# EAGLE board Bio_v4_LCD1_0_panelized (EAGLE 7.5.0)
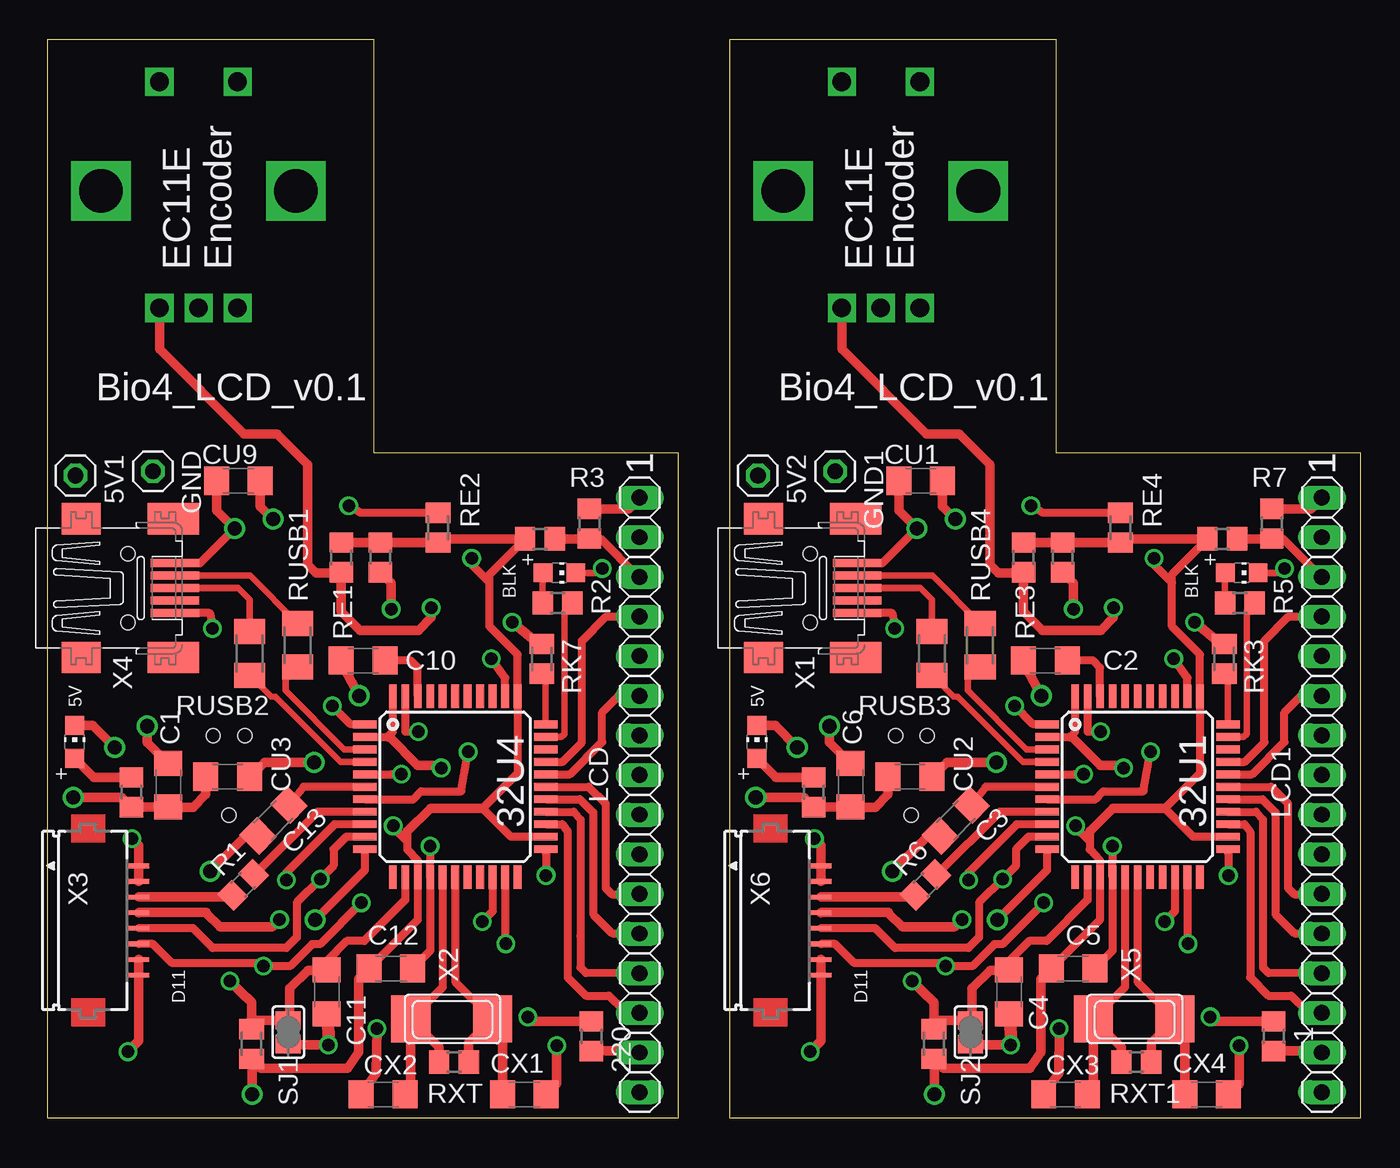
[diagram p0: board, top side]
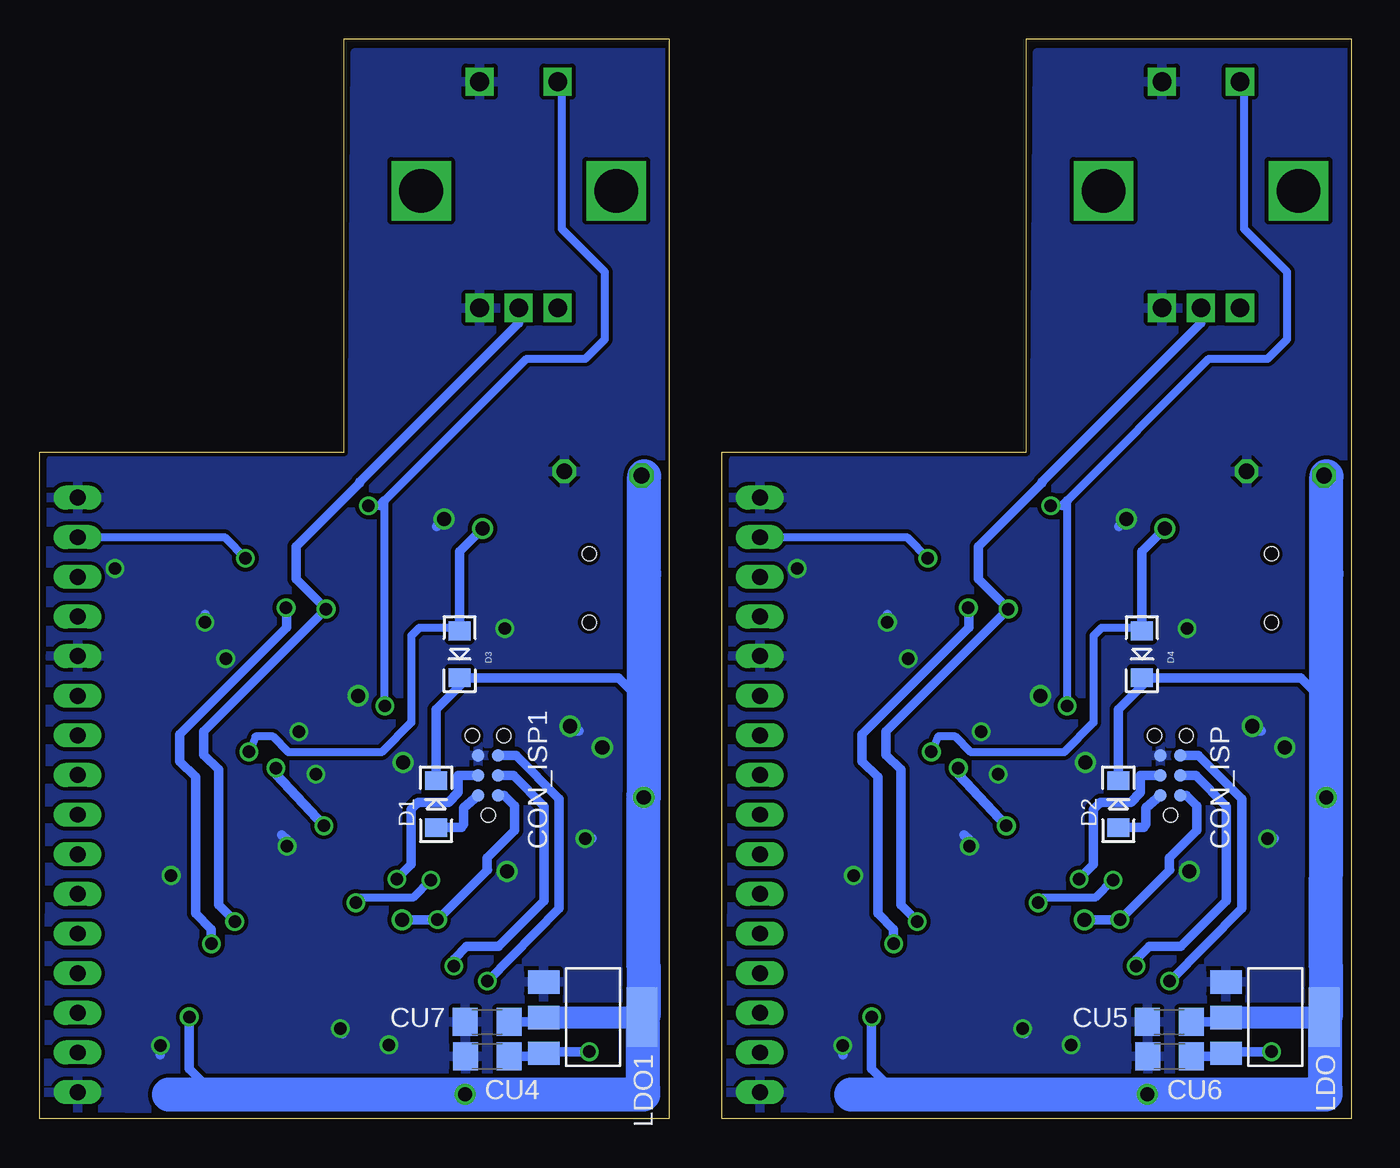
[diagram p1: board, bottom side, seen from below]

Size 84.13 x 69.15 mm. Coordinates in mm from the lower left corner, seen from the top.
Outline: 40.41,42.66 40.41,0 0,0 0,69.15 20.89,69.15 20.89,42.66 40.41,42.66
Outline: 84.13,42.66 84.13,0 43.72,0 43.72,69.15 64.61,69.15 64.61,42.66 84.13,42.66
Copper layers (1*2*15*16): Top 0.035mm / dielectric 0.2mm / layer 2 0.0175mm / dielectric 1.1mm / layer 15 0.0175mm / dielectric 0.2mm / Bottom 0.035mm
Design rules "SeeedStudio_DRU_no_angle_20130527": minimum track width 6mil, minimum drill 12mil, track to track 6mil, track to pad 6mil, pad to pad 6mil, via to via 6mil, smd to smd 0mil, copper to edge 10mil, drill to drill 10mil, minimum pad ring 6mil, minimum via ring 6mil, stop-mask expansion 2mil, vias tented up to drill 25mil, thermal gap 10mil
Net classes: 0 default: width 0.203 mm, clearance 0.25 mm; 1 power: width 0.203 mm, drill 0.305 mm, clearance 0.25 mm; 2 VIN: width 0.457 mm, clearance 0.25 mm; 3 fine: width 0.254 mm, clearance 0.25 mm; 4 aref: width 0.356 mm, clearance 0.25 mm
vRestrict: area 3.1,8.7 to 6.9,16.8; area 46.8,8.7 to 50.7,16.8

## Footprints (pad centres in the part's own frame; a part is rotated, then mirrored left to right if it is on the bottom)
R0805 = smd 1.3 x 1.5: 1 -0.95,0; 2 0.95,0
1X01 = drill 1.016 octagon: 1 0,0
TQFP44 = smd 1.5 x 0.5: 1 -5.8,4; 2 -5.8,3.2; 3 -5.8,2.4; 4 -5.8,1.6; 5 -5.8,0.8; 6 -5.8,0; 7 -5.8,-0.8; 8 -5.8,-1.6; 9 -5.8,-2.4; 10 -5.8,-3.2; 11 -5.8,-4; 23 5.8,-4; 24 5.8,-3.2; 25 5.8,-2.4; 26 5.8,-1.6; 27 5.8,-0.8; 28 5.8,0; 29 5.8,0.8; 30 5.8,1.6; 31 5.8,2.4; 32 5.8,3.2; 33 5.8,4 | smd 0.5 x 1.5: 12 -4,-5.8; 13 -3.2,-5.8; 14 -2.4,-5.8; 15 -1.6,-5.8; 16 -0.8,-5.8; 17 0,-5.8; 18 0.8,-5.8; 19 1.6,-5.8; 20 2.4,-5.8; 21 3.2,-5.8; 22 4,-5.8; 34 4,5.8; 35 3.2,5.8; 36 2.4,5.8; 37 1.6,5.8; 38 0.8,5.8; 39 0,5.8; 40 -0.8,5.8; 41 -1.6,5.8; 42 -2.4,5.8; 43 -3.2,5.8; 44 -4,5.8
CHIP-LED0805 = smd 1.2 x 1.2: A 0,-1.05; C 0,1.05
C1206 = smd 1.6 x 1.8: 1 -1.4,0; 2 1.4,0
TC2030-MCP-NL = smd 0.787 x 0.787: 5V 1.27,0.635; GND 3.81,0.635; MISO 1.27,-0.635; MOSI 2.54,0.635; RESET 3.81,-0.635; SCK 2.54,-0.635 | hole 0.889: 0,0; 5.08,-1.016; 5.08,1.016
LED-1206 = smd 1.2 x 1.4: A -1.5,0; C 1.5,0
1X16 = drill 1.016 long: 1 -19.05,0; 2 -16.51,0; 3 -13.97,0; 4 -11.43,0; 5 -8.89,0; 6 -6.35,0; 7 -3.81,0; 8 -1.27,0; 9 1.27,0; 10 3.81,0; 11 6.35,0; 12 8.89,0; 13 11.43,0; 14 13.97,0; 15 16.51,0; 16 19.05,0
SOT223 = smd 1.499 x 2.007: 1 -2.261,-3.15; 2 0.025,-3.15; 3 2.311,-3.15 | smd 3.81 x 2.007: 4 0,3.15
M0805 = smd 1.3 x 1.6: 1 -0.95,0; 2 0.95,0
M1206 = smd 1.6 x 2: 1 -1.4,0; 2 1.4,0
SJ = smd 1.168 x 1.6: 1 -0.762,0; 2 0.762,0
EC11E = drill 1.2 square: A -2.5,0; B 0,0; C 2.5,0; D -2.5,14.5; E 2.5,14.5 | drill 2.8 square: P$1 6.25,7.5; P$2 -6.25,7.5
32005-201 = smd 3.1 x 0.5: 1 3,1.6; 2 3,0.8; 3 3,0; 4 3,-0.8; 5 3,-1.6 | smd 2.5 x 2: M1 -3,-4.45; M2 -3,4.45 | smd 3.3 x 2: M3 2.9,4.45; M4 2.9,-4.45 | hole 0.9: 0,2.2; 0,-2.2
NX6035 = smd 2.5 x 3: P$1 2.665,0; P$2 -2.565,0
FH12-08S-1SH = smd 0.3 x 1.3: 1 -3.5,3.25; 2 -2.5,3.25; 3 -1.5,3.25; 4 -0.5,3.25; 5 0.5,3.25; 6 1.5,3.25; 7 2.5,3.25; 8 3.5,3.25

## Placement (x,y rotation side)
1  220  [R0805]  78.56,5.25 270 top
5V1  [1X01]  1.79,41.19 270 top
5V2  [1X01]  45.51,41.19 270 top
32U1  32U4  [TQFP44]  69.84,21.24 0 top
32U4  32U4  [TQFP44]  26.12,21.24 0 top
220  220  [R0805]  34.85,5.25 270 top
BKLD  RED  [CHIP-LED0805]  32.8,34.95 270 top
BKLD1  RED  [CHIP-LED0805]  76.51,34.95 270 top
C1  100nF  [C1206]  7.74,21.34 90 top
C2  100nF  [C1206]  63.93,29.32 180 top
C3  100nF  [C1206]  58.19,19.08 45 top
C4  100nF  [C1206]  61.61,8.1 270 top
C5  100nF  [C1206]  65.72,9.6 180 top
C6  100nF  [C1206]  51.46,21.34 90 top
C10  100nF  [C1206]  20.22,29.32 180 top
C11  100nF  [C1206]  17.89,8.1 270 top
C12  100nF  [C1206]  22,9.6 180 top
C13  100nF  [C1206]  14.48,19.08 45 top
CON_ISP  SPI  [TC2030-MCP-NL]  11.63,19.43 90 bottom
CON_ISP1  SPI  [TC2030-MCP-NL]  55.35,19.43 90 bottom
CU1  10uF  [C1206]  55.95,40.84 180 top
CU2  10uF  [C1206]  55.26,21.88 0 top
CU3  10uF  [C1206]  11.54,21.88 0 top
CU4  10uF  [C1206]  55.41,3.97 180 bottom
CU5  10uF  [C1206]  11.7,6.17 180 bottom
CU6  10uF  [C1206]  11.69,3.97 180 bottom
CU7  10uF  [C1206]  55.42,6.17 180 bottom
CU9  10uF  [C1206]  12.23,40.84 180 top
CX1  22pF  [C1206]  30.55,1.53 180 top
CX2  22pF  [C1206]  21.5,1.52 0 top
CX3  22pF  [C1206]  65.22,1.52 0 top
CX4  22pF  [C1206]  74.27,1.53 180 top
D1  1N581D1206  [LED-1206]  58.69,20.12 90 bottom
D2  1N581D1206  [LED-1206]  14.97,20.12 90 bottom
D3  1N581D1206  [LED-1206]  57.17,29.73 270 bottom
D4  1N581D1206  [LED-1206]  13.46,29.73 270 bottom
GND  [1X01]  6.75,41.45 270 top
GND1  [1X01]  50.47,41.45 270 top
LCD  [1X16]  37.94,20.72 270 top
LCD1  [1X16]  81.66,20.72 270 top
LDO  NCP1117LPST50T3G  [SOT223]  4.92,6.47 270 bottom
LDO1  NCP1117LPST50T3G  [SOT223]  48.64,6.47 270 bottom
LDPW1  RED  [CHIP-LED0805]  45.45,24.11 0 top
LDPW5  RED  [CHIP-LED0805]  1.74,24.11 0 top
R1  1k  [R0805]  12.53,14.95 45 top
R2  1k  [R0805]  32.67,33.01 180 top
R3  1k  [R0805]  34.72,38.09 90 top
R4  1k  [R0805]  49.09,20.89 90 top
R5  1k  [R0805]  76.39,33.01 180 top
R6  1k  [R0805]  56.25,14.95 45 top
R7  1k  [R0805]  78.44,38.09 90 top
R13  1k  [R0805]  5.37,20.89 90 top
RE1  5k  [R0805]  18.82,35.93 270 top
RE2  5k  [R0805]  21.32,35.94 270 top
RE3  5k  [R0805]  62.54,35.93 270 top
RE4  5k  [R0805]  65.04,35.94 270 top
RK1  10k  [R0805]  31.55,37.12 0 top
RK2  10k  [M0805]  25.01,37.84 270 top
RK3  10k  [M0805]  75.39,29.43 270 top
RK4  10k  [M0805]  56.79,4.76 270 top
RK5  10k  [R0805]  75.27,37.12 0 top
RK6  10k  [M0805]  13.07,4.76 270 top
RK7  10k  [M0805]  31.67,29.43 270 top
RK8  10k  [M0805]  68.73,37.84 270 top
RUSB1  22  [M1206]  16.03,30.31 90 top
RUSB2  22  [M1206]  12.96,29.77 90 top
RUSB3  22  [M1206]  56.67,29.77 90 top
RUSB4  22  [M1206]  59.75,30.31 90 top
RXT  1M  [R0805]  26.04,3.6 0 top
RXT1  1M  [R0805]  69.76,3.6 0 top
SJ1  [SJ]  15.42,5.51 90 top
SJ2  [SJ]  59.14,5.51 90 top
U$1  EC11E  [EC11E]  9.67,51.92 0 top
U$2  EC11E  [EC11E]  53.39,51.92 0 top
X1  MINI-USB  [32005-201]  48.88,33.97 0 top
X2  16MHz  [NX6035]  25.94,6.36 180 top
X3  FH12-08S-1SH  [FH12-08S-1SH]  2.6,12.67 270 top
X4  MINI-USB  [32005-201]  5.16,33.97 0 top
X5  16MHz  [NX6035]  69.66,6.36 180 top
X6  FH12-08S-1SH  [FH12-08S-1SH]  46.32,12.67 270 top

## Library data of the parts
1 220 C1-C6 C10-C13 CU1-CU7 CU9 CX1-CX4 R1-R3 R5-R7 RE1-RE4 RK1 RK5 RXT RXT1 = rcl
5V1 5V2 GND GND1 = Headerlibrary
32U1 32U4 BKLD BKLD1 LDPW1 LDPW5 = adafruit
CON_ISP CON_ISP1 D1-D4 LCD LCD1 LDO LDO1 U$1 U$2 X2 X5 = lpatiny
R4 R13 RK2-RK4 RK6-RK8 RUSB1-RUSB4 = resistor
SJ1 SJ2 = jumper
X1 X4 = con-cypressindustries; OC_FARNELL: unknown; OC_NEWARK: unknown
X3 X6 = con-hirose; OC_FARNELL: unknown; OC_NEWARK: unknown

## Nets
+5V/1 [fine]: 5V1.1 32U4.2 32U4.14 32U4.24 32U4.34 32U4.44 220.1 C1.1 C12.2 CU3.1 CU5.1 D2.C D4.C LCD.2 LDO.2 LDO.4 R13.1 RE1.1 RE2.1 RK1.1 RK2.2 RK6.2
+5V/2 [fine]: 1.1 5V2.1 32U1.2 32U1.14 32U1.24 32U1.34 32U1.44 C5.2 C6.1 CU2.1 CU7.1 D1.C D3.C LCD1.2 LDO1.2 LDO1.4 R4.1 RE3.1 RE4.1 RK4.2 RK5.1 RK8.2
+12V [power]: CU6.1 LDO.3 X3.7 X3.8
+12V1 [power]: CU4.1 LDO1.3 X6.7 X6.8
A0: 32U4.36
A1: 32U4.37
A2: 32U4.38
A3: 32U4.39
A4: 32U4.40
A5: 32U4.41
A6: 32U4.25 LCD.14
A7: 32U1.38
A8: 32U1.39
A9: 32U1.40
A10: 32U1.41
A11: 32U1.37
A12: 32U1.36
A13: 32U1.25 LCD1.14
AREF: 32U4.42 C10.1
AREF1: 32U1.42 C2.1
CS_32U1: R6.1 X6.3
CS_32U4: R1.1 X3.3
D5*: 32U4.31
D5*1: 32U1.31
D6*: 32U4.27 LCD.12
D6*1: 32U1.27 LCD1.12
D7*: 32U4.1 RK2.1 U$1.D
D7*1: 32U1.1 RK8.1 U$2.D
D8*: 32U4.28 LCD.11
D8*1: 32U1.28 LCD1.11
D9*: 32U4.29 LCD.6
D9*1: 32U1.29 LCD1.6
D10*: 32U4.30 LCD.4
D10*1: 32U1.30 LCD1.4
D11*: 32U4.12
D11*1: 32U1.12
D12*: 32U4.26 LCD.13
D12*1: 32U1.26 LCD1.13
D13*: 32U4.32 R2.1
D13*1: 32U1.32 R5.1
GND [power]: 32U4.5 32U4.15 32U4.23 32U4.35 32U4.43 BKLD.C C1.2 C10.2 C11.2 C12.1 C13.1 CON_ISP.GND CU3.2 CU5.2 CU6.2 CU9.1 CX1.1 CX2.1 GND.1 LCD.1 LCD.5 LCD.16 LDO.1 LDPW5.C R3.2 RK7.1 SJ1.1 U$1.C U$1.E X3.1 X3.2 X4.5
GND1 [power]: 32U1.5 32U1.15 32U1.23 32U1.35 32U1.43 BKLD1.C C2.2 C3.1 C4.2 C5.1 C6.2 CON_ISP1.GND CU1.1 CU2.2 CU4.2 CU7.2 CX3.1 CX4.1 GND1.1 LCD1.1 LCD1.5 LCD1.16 LDO1.1 LDPW1.C R7.2 RK3.1 SJ2.1 U$2.C U$2.E X1.5 X6.1 X6.2
HWB: 32U4.33 RK7.2
HWB1: 32U1.33 RK3.2
ISP+5V: CON_ISP.5V D2.A
ISP+5V1: CON_ISP1.5V D1.A
MISO: 32U4.11 CON_ISP.MISO X3.4
MISO1: 32U1.11 CON_ISP1.MISO X6.4
MOSI: 32U4.10 CON_ISP.MOSI X3.5
MOSI1: 32U1.10 CON_ISP1.MOSI X6.5
N$1: 32U4.6 C13.2
N$2: LCD.3 R3.1 RK1.2
N$3: BKLD.A R2.2
N$4: LDPW1.A R4.2
N$5: BKLD1.A R5.2
N$6: 32U1.17 CX4.2 RXT1.2 X5.P$2
N$7: 32U1.6 C3.2
N$8: LCD1.3 R7.1 RK5.2
N$9: 1.2 LCD1.15
N$11: 220.2 LCD.15
N$12: LDPW5.A R13.2
N$42: 32U4.17 CX1.2 RXT.2 X2.P$2
RESET: 32U4.13 C11.1 CON_ISP.RESET RK6.1 SJ1.2
RESET1: 32U1.13 C4.1 CON_ISP1.RESET RK4.1 SJ2.2
RX: 32U4.20 RE2.2 U$1.B
RX1: 32U1.20 RE4.2 U$2.B
RXLED: 32U4.8 R1.2
RXLED1: 32U1.8 R6.2
SCK: 32U4.9 CON_ISP.SCK X3.6
SCK1: 32U1.9 CON_ISP1.SCK X6.6
SCL: 32U4.18
SCL1: 32U1.18
SDA: 32U4.19
SDA1: 32U1.19
TX: 32U4.21 RE1.2 U$1.A
TX1: 32U1.21 RE3.2 U$2.A
TXLED: 32U4.22
TXLED1: 32U1.22
USB_N: 32U4.3 RUSB1.1
USB_N1: 32U1.3 RUSB4.1
USB_P: 32U4.4 RUSB2.1
USB_P1: 32U1.4 RUSB3.1
USBC_N: RUSB1.2 X4.2
USBC_N1: RUSB4.2 X1.2
USBC_P: RUSB2.2 X4.3
USBC_P1: RUSB3.2 X1.3
VUSB: 32U4.7 CU9.2 D4.A X4.1
VUSB1: 32U1.7 CU1.2 D3.A X1.1
XTAL1: 32U4.16 CX2.2 RXT.1 X2.P$1
XTAL2: 32U1.16 CX3.2 RXT1.1 X5.P$1

## Tracks (layer width: path | path; a pad name or v marks a point on that pad's centre or on a via)
+5V/1  (via drill 0.8, 0.8 pad 0.81, 0.9, 0.9 pad 0.61)
  Top 0.5: 32U4.24 29.68,18.04 27.87,19.85 30.12,22.1 32U4.34 30.12,29.71 28.32,31.51 28.32,34.33 | 23.05,18.36 23.05,17.73 | 23.05,17.73 23.05,17.22 23.72,16.51 23.72,15.45 32U4.14 23.72,12.72 C12.2 | 32U4.44 22.12,24.75 21.81,24.44 32U4.2 | 22.05,18.74 23.05,17.73 | 28.32,34.33 28.32,34.84 RK1.1 | v27.18,35.88 27.18,35.47 28.32,34.33
  Top 0.61: 27.87,19.85 24.54,19.85 23.05,18.36 | C12.2 19.93,8.93 19.93,4.23 19.23,3.21 13.67,3.21 13.1,3.77 | 21.81,24.44 21.91,24.44 23.73,22.62 25.04,22.62 v25.22,22.44 | v22.15,18.74 22.05,18.74 | RK6.2 13.1,3.77 | 13.1,3.77 v13.1,1.52 | v1.66,20.56 4.75,20.56 R13.1 C1.1 7.75,19.93 9.32,19.93 10.14,20.75 CU3.1 | 220.1 31.07,6.2 v30.78,6.49 | RE1.1 RE2.1 RK2.2 25.24,37.12 RK1.1 30.37,36.89
  Bottom 0.254: 5V1.1 1.53,41.42 1.64,41.13
  Bottom 0.5: LCD.2 28.52,37.23 v27.18,35.88
  Bottom 0.61: v25.22,22.44 25.22,22.04 v22.15,18.74 | 2.4,1.52 2.06,1.52 1.7,1.88 | v1.66,20.56 v1.66,20.57 1.66,21.06 | v30.78,6.49 30.78,3.15 29.15,1.52 | D4.C 12.95,28.23 | 12.95,28.23 3.26,28.23 1.65,26.61 | D2.C 14.97,26.21 12.95,28.23 | 1.68,9.86 1.68,10.36 1.68,10.37 | CU5.1 8.35,6.17 LDO.2
  Bottom 1.422: LDO.2 8.07,6.47 LDO.4
  Bottom 2.184: 32.1,1.52 31.61,1.52 29.15,1.52 v13.1,1.52 2.4,1.52 1.7,1.52 1.7,1.88 1.7,6.47 LDO.4 1.68,6.47 1.68,9.86 1.68,10.37 v1.66,20.56 1.66,21.06 1.65,25.49 1.65,26.61 1.65,29.21 1.64,34.88 1.64,41.13
+5V/2  (via drill 0.8, 0.8 pad 0.81, 0.9, 0.9 pad 0.61)
  Top 0.5: 32U1.24 73.4,18.04 71.59,19.85 73.84,22.1 32U1.34 73.84,29.71 72.04,31.51 72.04,34.33 | 66.77,18.36 66.77,17.73 | 66.77,17.73 66.77,17.22 67.44,16.51 67.44,15.45 32U1.14 67.44,12.72 C5.2 | 32U1.44 65.84,24.75 65.52,24.44 32U1.2 | 65.77,18.74 66.77,17.73 | 72.04,34.33 72.04,34.84 RK5.1 | v70.89,35.88 70.89,35.47 72.04,34.33
  Top 0.61: 71.59,19.85 68.26,19.85 66.77,18.36 | C5.2 63.65,8.93 63.65,4.23 62.95,3.21 57.39,3.21 56.82,3.77 | 65.52,24.44 65.63,24.44 67.44,22.62 68.76,22.62 v68.94,22.44 | v65.87,18.74 65.77,18.74 | RK4.2 56.82,3.77 | 56.82,3.77 v56.82,1.52 | v45.38,20.56 48.47,20.56 R4.1 C6.1 51.47,19.93 53.04,19.93 53.86,20.75 CU2.1 | 1.1 74.79,6.2 v74.5,6.49 | RE3.1 RE4.1 RK8.2 68.96,37.12 RK5.1 74.09,36.89
  Bottom 0.254: 5V2.1 45.25,41.42 45.36,41.13
  Bottom 0.5: LCD1.2 72.24,37.23 v70.89,35.88
  Bottom 0.61: v68.94,22.44 68.94,22.04 v65.87,18.74 | 46.12,1.52 45.78,1.52 45.42,1.88 | v45.38,20.56 v45.38,20.57 45.38,21.06 | v74.5,6.49 74.5,3.15 72.87,1.52 | D3.C 56.67,28.23 | 56.67,28.23 46.98,28.23 45.37,26.61 | D1.C 58.69,26.21 56.67,28.23 | 45.4,9.86 45.4,10.36 45.4,10.37 | CU7.1 52.06,6.17 LDO1.2
  Bottom 1.422: LDO1.2 51.79,6.47 LDO1.4
  Bottom 2.184: 75.82,1.52 75.33,1.52 72.87,1.52 v56.82,1.52 46.12,1.52 45.42,1.52 45.42,1.88 45.42,6.47 LDO1.4 45.4,6.47 45.4,9.86 45.4,10.37 v45.38,20.56 45.38,21.06 45.37,25.49 45.37,26.61 45.37,29.21 45.36,34.88 45.36,41.13
+12V  (via drill 0.8)
  Top 0.61: X3.7 X3.8 5.85,4.96 v5.15,4.26
  Bottom 0.61: v5.15,4.26 7.97,4.26 LDO.3 8.26,3.97 CU6.1
+12V1  (via drill 0.8)
  Top 0.61: X6.7 X6.8 49.57,4.96 v48.87,4.26
  Bottom 0.61: v48.87,4.26 51.69,4.26 LDO1.3 51.98,3.97 CU4.1
A6
  Top 0.5: 32U4.25 32.98,18.84 33.33,18.37 33.33,9.02 34.5,7.85 35.97,7.85 36.89,6.93 38.09,6.93 LCD.14
A13
  Top 0.5: 32U1.25 76.7,18.84 77.05,18.37 77.05,9.02 78.22,7.85 79.69,7.85 80.61,6.93 81.8,6.93 LCD1.14
AREF
  Top 0.5: 32U4.42 23.72,28.86 23.73,28.87 23.28,29.32 C10.1
AREF1
  Top 0.5: 32U1.42 67.44,28.86 67.45,28.87 67,29.32 C2.1
CS_32U1
  Top 0.61: X6.3 55.47,14.17 R6.1
CS_32U4
  Top 0.61: X3.3 11.75,14.17 R1.1
D6*
  Top 0.5: 32U4.27 34.12,20.44 34.96,19.6 34.96,13.07 36.17,11.86 38.23,11.86 LCD.12
D6*1
  Top 0.5: 32U1.27 77.84,20.44 78.67,19.6 78.67,13.07 79.89,11.86 81.95,11.86 LCD1.12
D7*  (via drill 0.8)
  Top 0.5: 32U4.1 19.43,25.24 v18.25,26.42 | RK2.1 20.07,38.79 v19.3,39.25
  Bottom 0.5: v18.25,26.42 18.25,39.58 9.16,48.66 5.4,48.66 4.15,49.92 4.15,54.22 6.91,56.98 6.91,66.16 | v19.3,39.25 18.56,39.27
  Bottom 0.61: 6.91,66.16 U$1.D | 18.56,39.27 18.25,39.58
D7*1  (via drill 0.8)
  Top 0.5: 32U1.1 63.15,25.24 v61.97,26.42 | RK8.1 63.79,38.79 v63.01,39.25
  Bottom 0.5: v61.97,26.42 61.97,39.58 52.88,48.66 49.12,48.66 47.87,49.92 47.87,54.22 50.63,56.98 50.63,66.16 | v63.01,39.25 62.27,39.27
  Bottom 0.61: 50.63,66.16 U$2.D | 62.27,39.27 61.97,39.58
D8*
  Top 0.5: 32U4.28 34.68,21.24 35.76,20.16 35.76,14.75 36.16,14.35 37.92,14.35
  Top 0.61: 37.92,14.35 LCD.11
D8*1
  Top 0.5: 32U1.28 78.4,21.24 79.48,20.16 79.48,14.75 79.87,14.35 81.64,14.35
  Top 0.61: 81.64,14.35 LCD1.11
D9*
  Top 0.5: 32U4.29 33.47,22.04 35.53,24.1 35.53,26 36.62,27.09 37.92,27.09
  Top 0.61: 37.92,27.09 LCD.6
D9*1
  Top 0.5: 32U1.29 77.19,22.04 79.25,24.1 79.25,26 80.34,27.09 81.64,27.09
  Top 0.61: 81.64,27.09 LCD1.6
D10*
  Top 0.5: 32U4.30 33,22.84 34.25,24.08 34.25,30.59 35.8,32.14 LCD.4
  Top 0.61: LCD.4
D10*1
  Top 0.5: 32U1.30 76.72,22.84 77.97,24.08 77.97,30.59 79.52,32.14 LCD1.4
  Top 0.61: LCD1.4
D12*
  Top 0.5: 32U4.26 33.72,19.64 34.15,19.12 34.15,11.68 34.15,9.66 34.5,9.31 LCD.13
D12*1
  Top 0.5: 32U1.26 77.44,19.64 77.87,19.12 77.87,11.68 77.87,9.66 78.22,9.31 LCD1.13
D13*
  Top 0.406: 32U4.32 32.91,24.44 33.13,24.62 33.13,32.48 R2.1
D13*1
  Top 0.406: 32U1.32 76.63,24.44 76.84,24.62 76.84,32.48 R5.1
GND  (via drill 0.8, 0.8 pad 0.81, 0.9, 0.9 pad 0.81)
  Top 0.406: BKLD.C 35.26,34.95 v35.54,35.22
  Top 0.5: v24.51,17.43 24.53,17.35 32U4.15 24.52,10.72 C12.1 | 32U4.5 22.05,22.04 v22.67,22.05 | 32U4.23 31.93,16.97 v31.94,15.56 | 32U4.43 22.92,24.78 v23.76,24.77 | v10.57,31.38 10.41,32.35 10.39,32.37 X4.5 | 32U4.35 29.32,28.22 v28.44,29.44
  Top 0.61: CX2.1 21.07,2.89 v21.1,5.74 | v32.63,4.66 32.63,2.21 CX1.1 | C10.2 18.76,29.33 v19.95,27.07 | SJ1.1 15.47,4.7 v18,4.7 | LDPW5.C 2.91,25.16 v4.32,23.75 | C1.2 6.38,24.09 v6.38,25.12 | CU3.2 13.9,22.8 v17.08,22.8 | CU9.1 13.63,39.21 v14.45,38.39 | RK7.1 31.28,30.56 v29.77,31.79 | LCD.1 37.21,39.04 R3.2 | C13.1 12.68,18.09 v10.41,15.81 | X3.2 X3.1 5.85,17.48 v5.42,17.92
  Top 0.813: C11.2 17.99,6.54 v18,4.7
  Bottom 0.406: v35.54,35.22 35.46,35.22 35.34,35.34
  Bottom 0.5: v24.51,17.43 24.52,17.82
  Bottom 0.61: 24.52,17.82 24.86,18.16 | v32.63,4.66 32.63,4.07 | v21.1,5.74 21.08,5.54 20.95,5.4 | v4.32,23.75 4.32,23.89 4.3,23.91 | v6.38,25.12 6.07,24.81 5.82,24.81 | v17.08,22.8 16.87,23.07 17.12,22.97 | v14.45,38.39 | v14.45,38.39 14.92,37.92 | v29.77,31.79 29.77,32.27 | v5.42,17.92 4.97,17.92
  pour Bottom: 0.54,0.44 0.52,0.4 39.78,0.67 39.62,42.17 20.34,42.17 20.16,68.28 0.26,68.28 0.16,1.7 0.28,0.68
GND1  (via drill 0.8, 0.8 pad 0.81, 0.9, 0.9 pad 0.81)
  Top 0.406: BKLD1.C 78.98,34.95 v79.26,35.22
  Top 0.5: v68.23,17.43 68.25,17.35 32U1.15 68.24,10.72 C5.1 | 32U1.5 65.77,22.04 v66.38,22.05 | 32U1.23 75.65,16.97 v75.66,15.56 | 32U1.43 66.64,24.78 v67.48,24.77 | v54.29,31.38 54.13,32.35 54.11,32.37 X1.5 | 32U1.35 73.04,28.22 v72.16,29.44
  Top 0.61: CX3.1 64.79,2.89 v64.82,5.74 | v76.35,4.66 76.35,2.21 CX4.1 | C2.2 62.47,29.33 v63.67,27.07 | SJ2.1 59.19,4.7 v61.72,4.7 | LDPW1.C 46.63,25.16 v48.03,23.75 | C6.2 50.1,24.09 v50.1,25.12 | CU2.2 57.62,22.8 v60.8,22.8 | CU1.1 57.35,39.21 v58.17,38.39 | RK3.1 75,30.56 v73.49,31.79 | LCD1.1 80.93,39.04 R7.2 | C3.1 56.4,18.09 v54.13,15.81 | X6.2 X6.1 49.57,17.48 v49.14,17.92
  Top 0.813: C4.2 61.71,6.54 v61.72,4.7
  Bottom 0.406: v79.26,35.22 79.18,35.22 79.06,35.34
  Bottom 0.5: v68.23,17.43 68.24,17.82
  Bottom 0.61: 68.24,17.82 68.58,18.16 | v76.35,4.66 76.35,4.07 | v64.82,5.74 64.8,5.54 64.67,5.4 | v48.03,23.75 48.03,23.89 48.01,23.91 | v50.1,25.12 49.79,24.81 49.54,24.81 | v60.8,22.8 60.59,23.07 60.83,22.97 | v58.17,38.39 | v58.17,38.39 58.64,37.92 | v73.49,31.79 73.49,32.27 | v49.14,17.92 48.69,17.92
  pour Bottom: 44.26,0.44 44.24,0.4 83.5,0.67 83.34,42.17 64.06,42.17 63.88,68.28 43.98,68.28 43.88,1.7 44,0.68
HWB
  Top 0.406: 32U4.33 31.92,28.23 RK7.2
HWB1
  Top 0.406: 32U1.33 75.64,28.23 RK3.2
ISP+5V
  Bottom 0.61: CON_ISP.5V 13.22,19.87 13.22,18.82 13.32,18.64 14.95,18.64 D2.A
ISP+5V1
  Bottom 0.61: CON_ISP1.5V 56.94,19.87 56.94,18.82 57.04,18.64 58.67,18.64 D1.A
MISO  (via drill 0.8, 0.9 pad 0.61)
  Top 0.5: 32U4.11 20.32,15.89 v17.15,12.72
  Top 0.61: X3.4 5.87,13.19 10.17,13.19 10.17,13.14 11.05,12.25 14.4,12.25 v14.87,12.72
  Bottom 0.61: v17.15,12.72 v14.87,12.72 11.67,15.92 11.71,15.96 11.71,16.67 9.94,18.44 9.94,20.03 10.61,20.7 CON_ISP.MISO
MISO1  (via drill 0.8, 0.9 pad 0.61)
  Top 0.5: 32U1.11 64.04,15.89 v60.87,12.72
  Top 0.61: X6.4 49.59,13.19 53.89,13.19 53.89,13.14 54.77,12.25 58.12,12.25 v58.59,12.72
  Bottom 0.61: v60.87,12.72 v58.59,12.72 55.39,15.92 55.42,15.96 55.42,16.67 53.66,18.44 53.66,20.03 54.33,20.7 CON_ISP1.MISO
MOSI  (via drill 0.8)
  Top 0.5: 32U4.10 19.13,18.04 18.33,17.23 18.33,16.17 v17.48,15.32 15.97,13.82 15.97,11.59 15.3,10.91 10.58,10.91 9.32,12.17 X3.5
  Bottom 0.61: CON_ISP.MOSI 13.54,21.97 13.54,20.87 14.17,20.24 16.13,20.24 16.21,20.15 16.56,19.78 16.56,16.25 v17.48,15.32
MOSI1  (via drill 0.8)
  Top 0.5: 32U1.10 62.85,18.04 62.05,17.23 62.05,16.17 v61.2,15.32 59.69,13.82 59.69,11.59 59.02,10.91 54.3,10.91 53.03,12.17 X6.5
  Bottom 0.61: CON_ISP1.MOSI 57.26,21.97 57.26,20.87 57.89,20.24 59.84,20.24 59.93,20.15 60.27,19.78 60.27,16.25 v61.2,15.32
N$1
  Top 0.5: 32U4.6 16.4,21.24 C13.2
N$2
  Top 0.5: 37.88,34.69 35.43,37.14 R3.1
  Top 0.61: LCD.3 37.88,34.69 | R3.1 34.7,37.12 RK1.2
N$3
  Top 0.406: R2.2 31.73,34.93 BKLD.A
N$4
  Top 0.61: R4.2 46.68,21.84 LDPW1.A
N$5
  Top 0.406: R5.2 75.44,34.93 BKLD1.A
N$6
  Top 0.5: 32U1.17 69.84,8.75 X5.P$2
  Top 0.61: CX4.2 72.87,6.37 72.28,6.96 72.28,6.41 X5.P$2 70.71,4.84 RXT1.2
N$7
  Top 0.5: 32U1.6 60.12,21.24 C3.2
N$8
  Top 0.5: 81.6,34.69 79.15,37.14 R7.1
  Top 0.61: LCD1.3 81.6,34.69 | R7.1 78.42,37.12 RK5.2
N$9
  Top 0.61: 1.2 81.89,4.3 LCD1.15
N$11
  Top 0.61: 220.2 38.17,4.3 LCD.15
N$12
  Top 0.61: R13.2 2.96,21.84 LDPW5.A
N$42
  Top 0.5: 32U4.17 26.12,8.75 X2.P$2
  Top 0.61: CX1.2 29.15,6.37 28.56,6.96 28.56,6.41 X2.P$2 26.99,4.84 RXT.2
RESET  (via drill 0.8 pad 0.81)
  Top 0.5: 32U4.13 22.92,13.98 20.3,11.35 19.18,11.35 17.88,10.05
  Top 0.61: 18.01,9.62 C11.1 | C11.1 17.88,9.49 16.68,9.49 15.5,8.31 15.5,6.35 SJ1.2 13.07,6.27 RK6.1 13.07,7.42 v11.68,8.78 | 17.88,10.05 C11.1
  Bottom 0.61: CON_ISP.RESET 9.85,23.24 7.07,20.45 7.07,13.44 v11.68,8.78
RESET1  (via drill 0.8 pad 0.81)
  Top 0.5: 32U1.13 66.64,13.98 64.02,11.35 62.9,11.35 61.6,10.05
  Top 0.61: 61.73,9.62 C4.1 | C4.1 61.6,9.49 60.4,9.49 59.22,8.31 59.22,6.35 SJ2.2 56.79,6.27 RK4.1 56.79,7.42 v55.4,8.78 | 61.6,10.05 61.6,9.51 C4.1
  Bottom 0.61: CON_ISP1.RESET 53.57,23.24 50.79,20.45 50.79,13.44 v55.4,8.78
RX  (via drill 0.8)
  Top 0.5: 32U4.20 28.52,13.26 v27.87,12.6
  Top 0.61: v22.01,32.63 22.01,34.3 RE2.2
  Bottom 0.61: v27.87,12.6 27.87,12.64 28.91,13.68 28.91,22.35 29.85,23.29 29.85,24.79 v22.01,32.63 23.94,34.55 23.94,36.63 19.86,40.71 19.86,40.76 9.67,50.95 U$1.B
RX1  (via drill 0.8)
  Top 0.5: 32U1.20 72.24,13.26 v71.58,12.6
  Top 0.61: v65.73,32.63 65.73,34.3 RE4.2
  Bottom 0.61: v71.58,12.6 71.58,12.64 72.63,13.68 72.63,22.35 73.57,23.29 73.57,24.79 v65.73,32.63 67.66,34.55 67.66,36.63 63.58,40.71 63.58,40.76 53.39,50.95 U$2.B
RXLED
  Top 0.5: 32U4.8 17.3,19.64 13.28,15.62
  Top 0.61: R1.2 13.28,15.62
RXLED1
  Top 0.5: 32U1.8 61.02,19.64 57,15.62
  Top 0.61: R6.2 57,15.62
SCK  (via drill 0.8)
  Top 0.5: 32U4.9 18.39,18.84 15.31,15.76 v15.31,15.26 | X3.6 6.74,11.17 7.99,9.92 13.64,9.92 v13.82,9.74 15.53,9.74 16.94,11.15 17.45,11.15 v20.11,13.8
  Bottom 0.5: v15.31,15.26 16.44,14.13 20.11,14.13 v20.11,13.8
  Bottom 0.61: CON_ISP.SCK 10.99,21.96 10.02,21.96 8.05,19.99 8.05,13.94 10.97,11.01 13,11.01 13.82,10.18 v13.82,9.74
SCK1  (via drill 0.8)
  Top 0.5: 32U1.9 62.11,18.84 59.03,15.76 v59.03,15.26 | X6.6 50.46,11.17 51.71,9.92 57.36,9.92 v57.54,9.74 59.25,9.74 60.66,11.15 61.17,11.15 v63.82,13.8
  Bottom 0.5: v59.03,15.26 60.16,14.13 63.82,14.13 v63.82,13.8
  Bottom 0.61: CON_ISP1.SCK 53.74,21.96 51.77,19.99 51.77,13.94 54.69,11.01 56.71,11.01 57.54,10.18 v57.54,9.74
SCL
  Top 0.5: 26.92,15.45 32U4.18
SCL1
  Top 0.5: 70.64,15.45 32U1.18
TX  (via drill 0.8)
  Top 0.5: 32U4.21 29.32,11.22 v29.36,11.17
  Top 0.61: v24.58,32.71 24.58,32.08 23.76,31.26 20.02,31.26 18.8,32.48 18.8,34.97 RE1.2 18.78,34.94 17.2,34.94 16.65,35.49 16.65,41.9 14.7,43.85 12.6,43.85 7.17,49.28 U$1.A
  Bottom 0.61: v29.36,11.17 29.36,12.11 30.37,13.12 30.37,21.87 31.38,22.88 31.38,24.6 24.55,31.44 24.55,32.69 v24.58,32.71
TX1  (via drill 0.8)
  Top 0.5: 32U1.21 73.04,11.22 v73.08,11.17
  Top 0.61: v68.29,32.71 68.29,32.08 67.48,31.26 63.74,31.26 62.52,32.48 62.52,34.97 RE3.2 62.49,34.94 60.92,34.94 60.37,35.49 60.37,41.9 58.42,43.85 56.32,43.85 50.89,49.28 U$2.A
  Bottom 0.61: v73.08,11.17 73.08,12.11 74.09,13.12 74.09,21.87 75.1,22.88 75.1,24.6 68.27,31.44 68.27,32.69 v68.29,32.71
USB_N
  Top 0.406: 32U4.3 19.01,23.64 15.24,27.41 15.24,28.12 RUSB1.1
USB_N1
  Top 0.406: 32U1.3 62.73,23.64 58.96,27.41 58.96,28.12 RUSB4.1
USB_P
  Top 0.406: RUSB2.1 14.32,27.01 14.57,27 14.6,27 18.77,22.83 32U4.4
USB_P1
  Top 0.406: RUSB3.1 58.04,27.01 58.29,27 58.32,27 62.49,22.83 32U1.4
USBC_N
  Top 0.406: X4.2 12.98,34.77 RUSB1.2
USBC_N1
  Top 0.406: X1.2 56.7,34.77 RUSB4.2
USBC_P
  Top 0.406: X4.3 12.22,33.97 12.94,33.25 12.94,31.19 RUSB2.2
USBC_P1
  Top 0.406: X1.3 55.94,33.97 56.66,33.25 56.66,31.19 RUSB3.2
VUSB  (via drill 0.8 pad 0.81, 0.9)
  Top 0.5: 32U4.7 23.44,20.44 23.95,20.94 26.5,20.94 v26.95,23.47 | v11.99,37.78 9.77,35.57 X4.1
  Top 0.61: CU9.2 10.83,38.94 v11.99,37.78
  Bottom 0.5: 27.03,23.47 v26.95,23.47 26.53,24.46 25.42,24.46 24.41,23.45 18.46,23.45 16.55,25.36 16.55,30.91 16.03,31.44 13.67,31.44
  Bottom 0.61: D4.A 13.46,36.31 v11.99,37.78 | D4.A 13.52,31.23 | 13.67,31.44 D4.A
VUSB1  (via drill 0.8 pad 0.81, 0.9)
  Top 0.5: 32U1.7 67.16,20.44 67.66,20.94 70.22,20.94 v70.67,23.47 | v55.7,37.78 53.49,35.57 X1.1
  Top 0.61: CU1.2 54.55,38.94 v55.7,37.78
  Bottom 0.5: 70.75,23.47 v70.67,23.47 70.25,24.46 69.13,24.46 68.13,23.45 62.18,23.45 60.27,25.36 60.27,30.91 59.75,31.44 57.39,31.44
  Bottom 0.61: D3.A 57.18,36.31 v55.7,37.78 | D3.A 57.24,31.23 | 57.39,31.44 D3.A
XTAL1
  Top 0.5: 32U4.16 25.32,8.4 X2.P$1
  Top 0.61: CX2.2 23.28,1.89 X2.P$1 25.09,4.55 RXT.1
XTAL2
  Top 0.5: 32U1.16 69.04,8.4 X5.P$1
  Top 0.61: CX3.2 67,1.89 X5.P$1 68.81,4.55 RXT1.1

## Text on the board
tNames: EC11E / Encoder | EC11E / Encoder | Bio4_LCD_v0.1 | Bio4_LCD_v0.1 | 1 | 1 | BLK | BLK | 5V | 5V | D11 | D11
tValues: Screen / v0.1
203bmp: C:/Users/G/Pictures/logo_epfl.bmp